# Altium PCB HMC480.PcbDoc
Units mil, origin at the board's own origin, x right, y up, seen from the top; angles counter-clockwise.
Board outline 960 x 770 mil, 2 copper layers (Top Layer, Bottom Layer); 11 components, 7 nets, 29 pads, 71 vias.
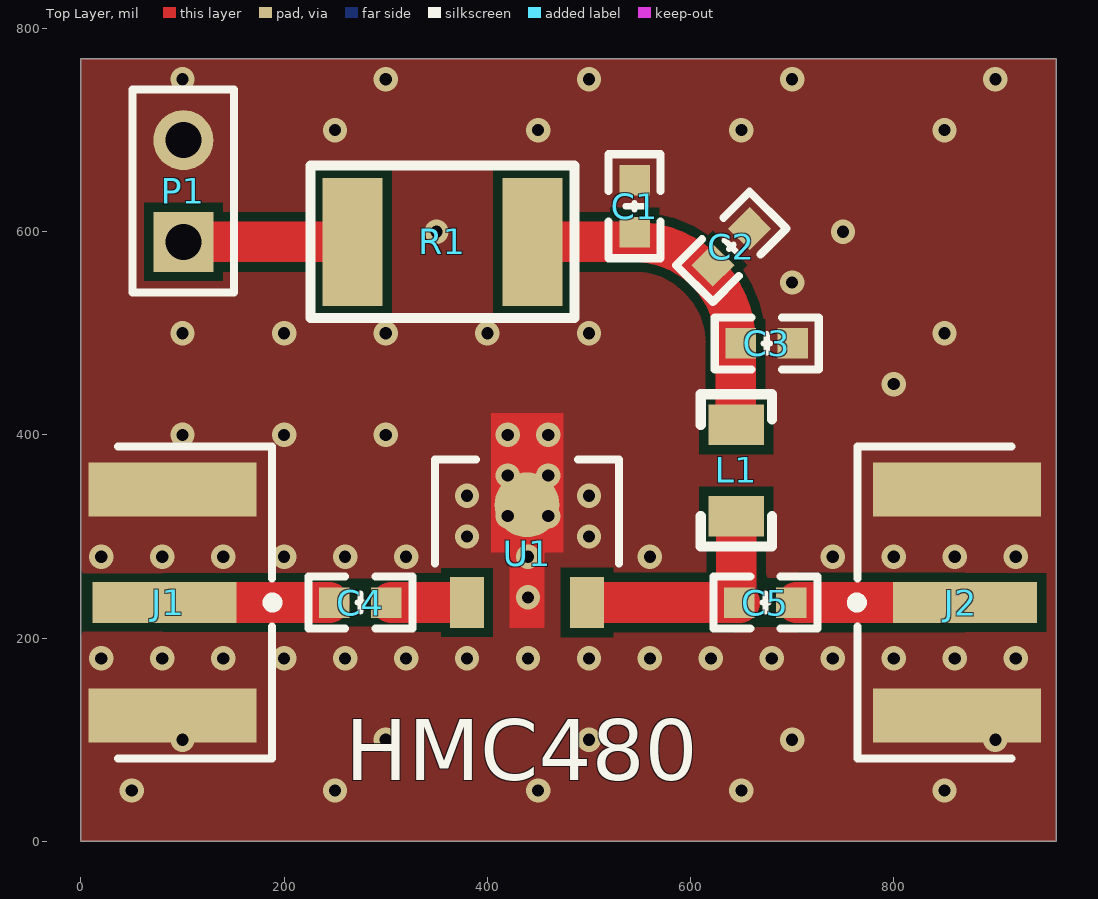
[diagram p0: Top Layer view]
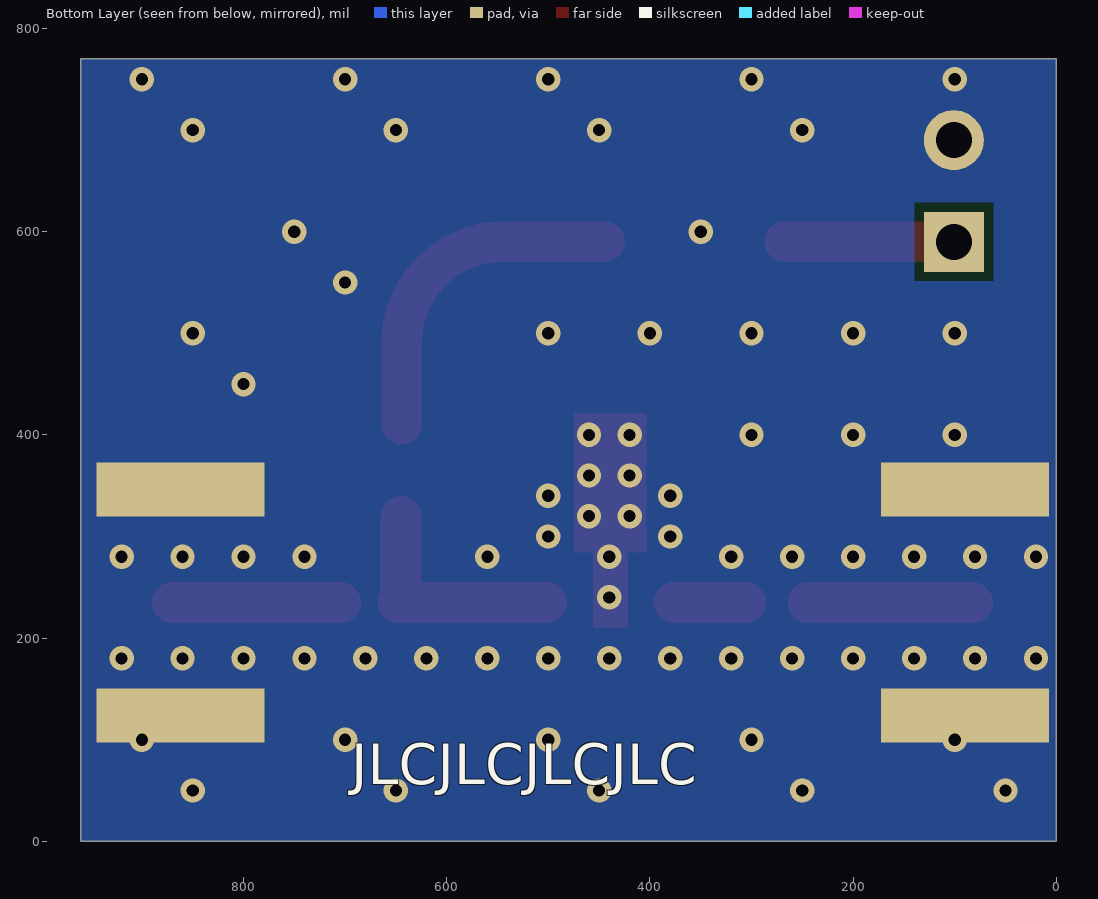
[diagram p1: Bottom Layer view, seen from below]

## Layer stack, top to bottom
Top Solder: solder mask 0.4, Solder Resist, Dk 3.5
Top Layer: signal copper 1.4
Dielectric 1: dielectric 12.6, FR-4, Dk 4.8
Bottom Layer: signal copper 1.4
Bottom Solder: solder mask 0.4, Solder Resist, Dk 3.5

## Board outline
0,0 960,0 960,770 0,770

## Design rules (kind name [scope] priority, off if disabled: settings)
Clearance [All] p1: gap=9 ignorepadtopadclearanceinfootprint=FALSE except(0: Arc-Hole Track-Hole SMDPad-Hole THPad-Hole Via-Hole Fill-Hole Poly-Hole Region-Hole Text-Hole; 10: Arc-Arc Arc-Track Arc-SMDPad Arc-THPad Arc-Via Arc-Text Track-Track Track-SMDPad Track-THPad Track-Via Track-Text SMDPad-SMDPad SMDPad-THPad SMDPad-Via SMDPad-Text THPad-THPad THPad-Via THPad-Text Via-Via Via-Text Text-Text)
PlaneConnect [All] p1: planeconnectstyle=Direct reliefexpansion=20 reliefentries=4 reliefconductorwidth=10 reliefairgap=10
PolygonConnect [All] p1: connectstyle=Direct reliefconductorwidth=10 reliefentries=4 polygonreliefangle="90 Angle" airgapwidth=10
RoutingVias [All] p1: holewidth=28 width=50 viastyle="Through Hole" minholewidth=28 minwidth=50 maxholewidth=28 maxwidth=50
SolderMaskExpansion [All] p1: expansion=4 istentingtop=FALSE
Width [All] p1: maxlimit=100 minlimit=10 preferedwidth=10
29 further rules are at their usual default settings.

## Components (designator, comment, footprint, x,y, rotation, side; value= is the part's Value field where it differs from the comment)
C1 "2.2uF" "C 0603_L" 545,625 r270 top
C2 "1nF" "C 0603_L" 640,585 r225 top
C3 "100pF" "C 0603_L" 675,490 r180 top
C4 "10nF" "C 0603_L" 275,235 r0 top
C5 "10nF" "C 0603_L" 673.7,235 r0 top
J1 "SMA-J-P-H-ST-EM1" FP-SMA-J-P-H-ST-EM1-MFG -180,235 r270 top
J2 "SMA-J-P-H-ST-EM1" FP-SMA-J-P-H-ST-EM1-MFG 1132.2,235 r90 top
L1 "270nH" "L 0805" 645,365 r90 top
P1 "Header 2" HDR1X2 100.83,590 r90 top
R1 "22" "R 1812_M" 355.83,590 r0 top
U1 "HMC480ST89E" FP-RK-3-MFG 439.06,324.67 r0 top

## Footprints (in the part's own frame and the unit in brackets; to place one, negate y for a bottom-side part, rotate by r counter-clockwise, add the part's x,y. Pads: shape width x height; smd on the part's side, far side on the other; paste and mask are expansions set on the pad)
"C 0603_L" [mil] "无极性贴片电容"
  rect 30x30 smd: 1(-25.59,0) 2(25.59,0)
  silkscreen extent -51,-26 51,26, body extent -31,-16 31,16, height 32
FP-RK-3-MFG [mm]
  rect 0.86x1.27 smd paste+0 mask+0: 1(-1.5,-2.278) 3(1.5,-2.278)
  round 1.62 smd paste+0 mask+0: 2(0,0.164)
  Top Layer region: -0.9,2.458 0.9,2.458 0.9,-1.022 0.43,-1.022 0.43,-2.913 -0.43,-2.913 -0.43,-1.022 -0.9,-1.022 -0.9,2.458
  silkscreen extent -2.3,-1.3 2.3,1.3, body extent -2.4,-3.01 2.4,2.56, height 0.25
FP-SMA-J-P-H-ST-EM1-MFG [mm]
  rect 1.016x3.6 smd paste+0 mask+0: 1(0,6.66)
  rect 1.35x4.2 smd paste+0 mask+0: 2(-2.825,6.86) 3(2.825,6.86)
  rect 1.35x4.2 smd far side paste+0 mask+0: 4(-2.825,6.86) 5(2.825,6.86)
  silkscreen extent -3.9,5.5 3.9,9.49, body extent -3.6,-4.92 3.6,9.06, height 0.25
HDR1X2 [mm] "Connector; Header; 2 Position"
  rect 1.5x1.5 hole 0.9: 1(0,0)
  round 1.5 hole 0.9: 2(2.54,0)
  silkscreen extent -1.27,-1.27 3.81,1.27
"L 0805" [mil] "小功率贴片电感"
  rect 40x55 smd: 1(-45,0) 2(45,0)
  silkscreen extent -75,-35 75,35, body extent -39,-24 39,24, height 35
"R 1812_M" [mm] "1/2W贴片电阻"
  rect 1.5x3.2 smd: 1(-2.25,0) 2(2.25,0)
  silkscreen extent -3.3,-1.91 3.3,1.91, body extent -2.25,-1.6 2.25,1.6, height 0.55

## Part data
C1 C2 C3 C4 C5: library part C, "贴片电容", BOM名称=贴片电容, 下单链接=https://item.taobao.com/item.htm?ft=t&id=613637044352, 淘宝ID=小糖豆的小窝窝
J1 J2: library part CMP-02754-000006-1, "CONN SMA JACK STR 50OHM EDGE MNT", Case/Package=SMA, Dielectric Material=PTFE, Housing Color=Gold, Max Frequency=6GHz, Max Operating Temperature=125°C, Min Operating Temperature=-65°C, Package Quantity=1, Voltage Rating=335V, Body Material=Brass, Body Plating=Gold, Center Contact Plating=Gold, Connector Type=SMA, Contact Material=Copper, Contact Plating=Gold, Depth=13.33mm, Fastening Type=Threaded, Impedance=50R, Insulation Material=Polytetrafluoroethylene, Length=6.35mm, Mount=Edge, Orientation=Straight, Packaging=Tray, Radiation Hardening=No, RoHS Compliant=Yes, Series=SMA, Termination=Solder
L1: library part L, "高频绕线电感", BOM名称=小功率贴片电感, 下单链接=https://item.taobao.com/item.htm?ft=t&id=613637044352
P1: "Header, 2-Pin", LatestRevisionDate=17-Jul-2002, LatestRevisionNote="Re-released for DXP Platform.", Publisher="Altium Limited"
R1: library part R, "贴片电阻", BOM名称=贴片电阻, 下单链接=https://item.taobao.com/item.htm?ft=t&id=613637044352, 淘宝ID=小糖豆的小窝窝
U1: library part CMP-09142-000230-1, "IC RF AMP GP 0HZ-5GHZ SOT89", Case/Package=TO-243AA, Max Frequency=5GHz, Max Operating Temperature=85°C, Max Power Dissipation=536mW, Max Supply Voltage=8V, Min Operating Temperature=-40°C, Min Supply Voltage=6V, Operating Frequency="DC to 5 GHz", Operating Supply Current=82mA, Package Quantity=50, Contact Plating=Tin, Gain=19dB, Lead Free="Contains Lead", Mount="Surface Mount", Noise Figure=4dB, Number of Channels=1, Number of Pins=3, Operating Supply Voltage=8V, P1dB=20dBm, Packaging=Strip, RoHS Compliant=Yes, Series=-, Weight=0.004603oz

## Via types
v1: diameter 24, hole 12, Top Layer to Bottom Layer, tented both sides, 71 vias

## Nets (pads, with @x,y where several pads share a name; then routed paths per layer and width w, separated by ;. In a path a pad name is that pad's centre, name@x,y a point inside that pad or via, vN(x,y) a via of type N, cw(c..) or ccw(c..) an arc to the next point about the centre after c; other vN are vias at no path point)
+7: P1.1 R1.1 | length 166.4
  Top Layer w40: P1.1 R1.1
GND: C1.1 C2.1 C3.1 J1.2 J1.3 J1.4 J1.5 J2.2 J2.3 J2.4 J2.5 P1.2 U1.2
  other v1: 50,50 250,50 450,50 650,50 850,50 100,100 300,100 500,100 700,100 900,100 20,180 80,180 140,180 200,180 260,180 320,180 380,180 440,180 500,180 560,180 620,180 680,180 740,180 800,180 860,180 920,180 440,240 20,280 80,280 140,280 200,280 260,280 320,280 440,280 560,280 740,280 800,280 860,280 920,280 380,300 500,300 420,320 460,320 380,340 500,340 420,360 460,360 100,400 200,400 300,400 420,400 460,400 800,450 100,500 200,500 300,500 400,500 500,500 850,500 700,550 350,600 750,600 250,700 450,700 650,700 850,700 100,750 300,750 500,750 700,750 900,750
NetC1_2: C1.2 C2.2 C3.2 L1.2 R1.2 | length 337.3
  Top Layer w30: L1.2@644.42,410.58 L1.2
  Top Layer w40: R1.2 544.42,590 cw(c544.42,490) 644.42,490 L1.2@644.42,410.58
NetC4_1: C4.1 J1.1 | length 162.2
  Top Layer w40: J1.1 C4.1@244.45,235
NetC4_2: C4.2 U1.1 | length 70.6
  Top Layer w40: C4.2@305.69,235 U1.1@376.32,235
NetC5_1: C5.1 L1.1 U1.3 | length 232.6
  Top Layer w30: L1.1 L1.1@648.11,316.89
  Top Layer w40: U1.3@501.4,235 C5.1@642.83,235 ; L1.1 645,238.11 ccw(c648.11,238.11) C5.1
NetC5_2: C5.2 J2.1 | length 165.6
  Top Layer w40: C5.2@704.36,235 J2.1

## Polygon pours and split planes (outlines as drawn)
GND on Bottom Layer "NONET_L-01_P-001" (solid, remove dead copper, pour order 1): 0,770 960,770 960,0 0,0
GND on Top Layer "NONET_L-01_P-001" (solid, remove dead copper, pour order 2): 0,770 960,770 960,0 0,0
GND on Top Layer "NONET_L-01_P-001" (solid, remove dead copper, shelved, pour order 0): 0,770 960,770 960,0 0,0
no net on Bottom Solder "NONET_L-01_P-001" (solid): 281,450 281,150 581,150 581,450

## Silkscreen, mask and mechanical layers (free items; w line width, h text height)
Top Overlay:
  text "HMC480" at 260,60 h60
Bottom Overlay:
  text "JLCJLCJLCJLC" at 694,56 h40
Mechanical 1:
  the board outline again, w10